# Altium PCB PCB1.PcbDoc
Units mm, origin at the board's own origin, x right, y up, seen from the top; angles counter-clockwise.
Board outline 49.78 x 45.47 mm, 4 copper layers (Top Layer, GROUND, POWER, Bottom Layer), stack 1.565 mm thick; 40 components, 39 nets, 194 pads, 11 vias.
Unrouted connection lines stored in the file: 68.
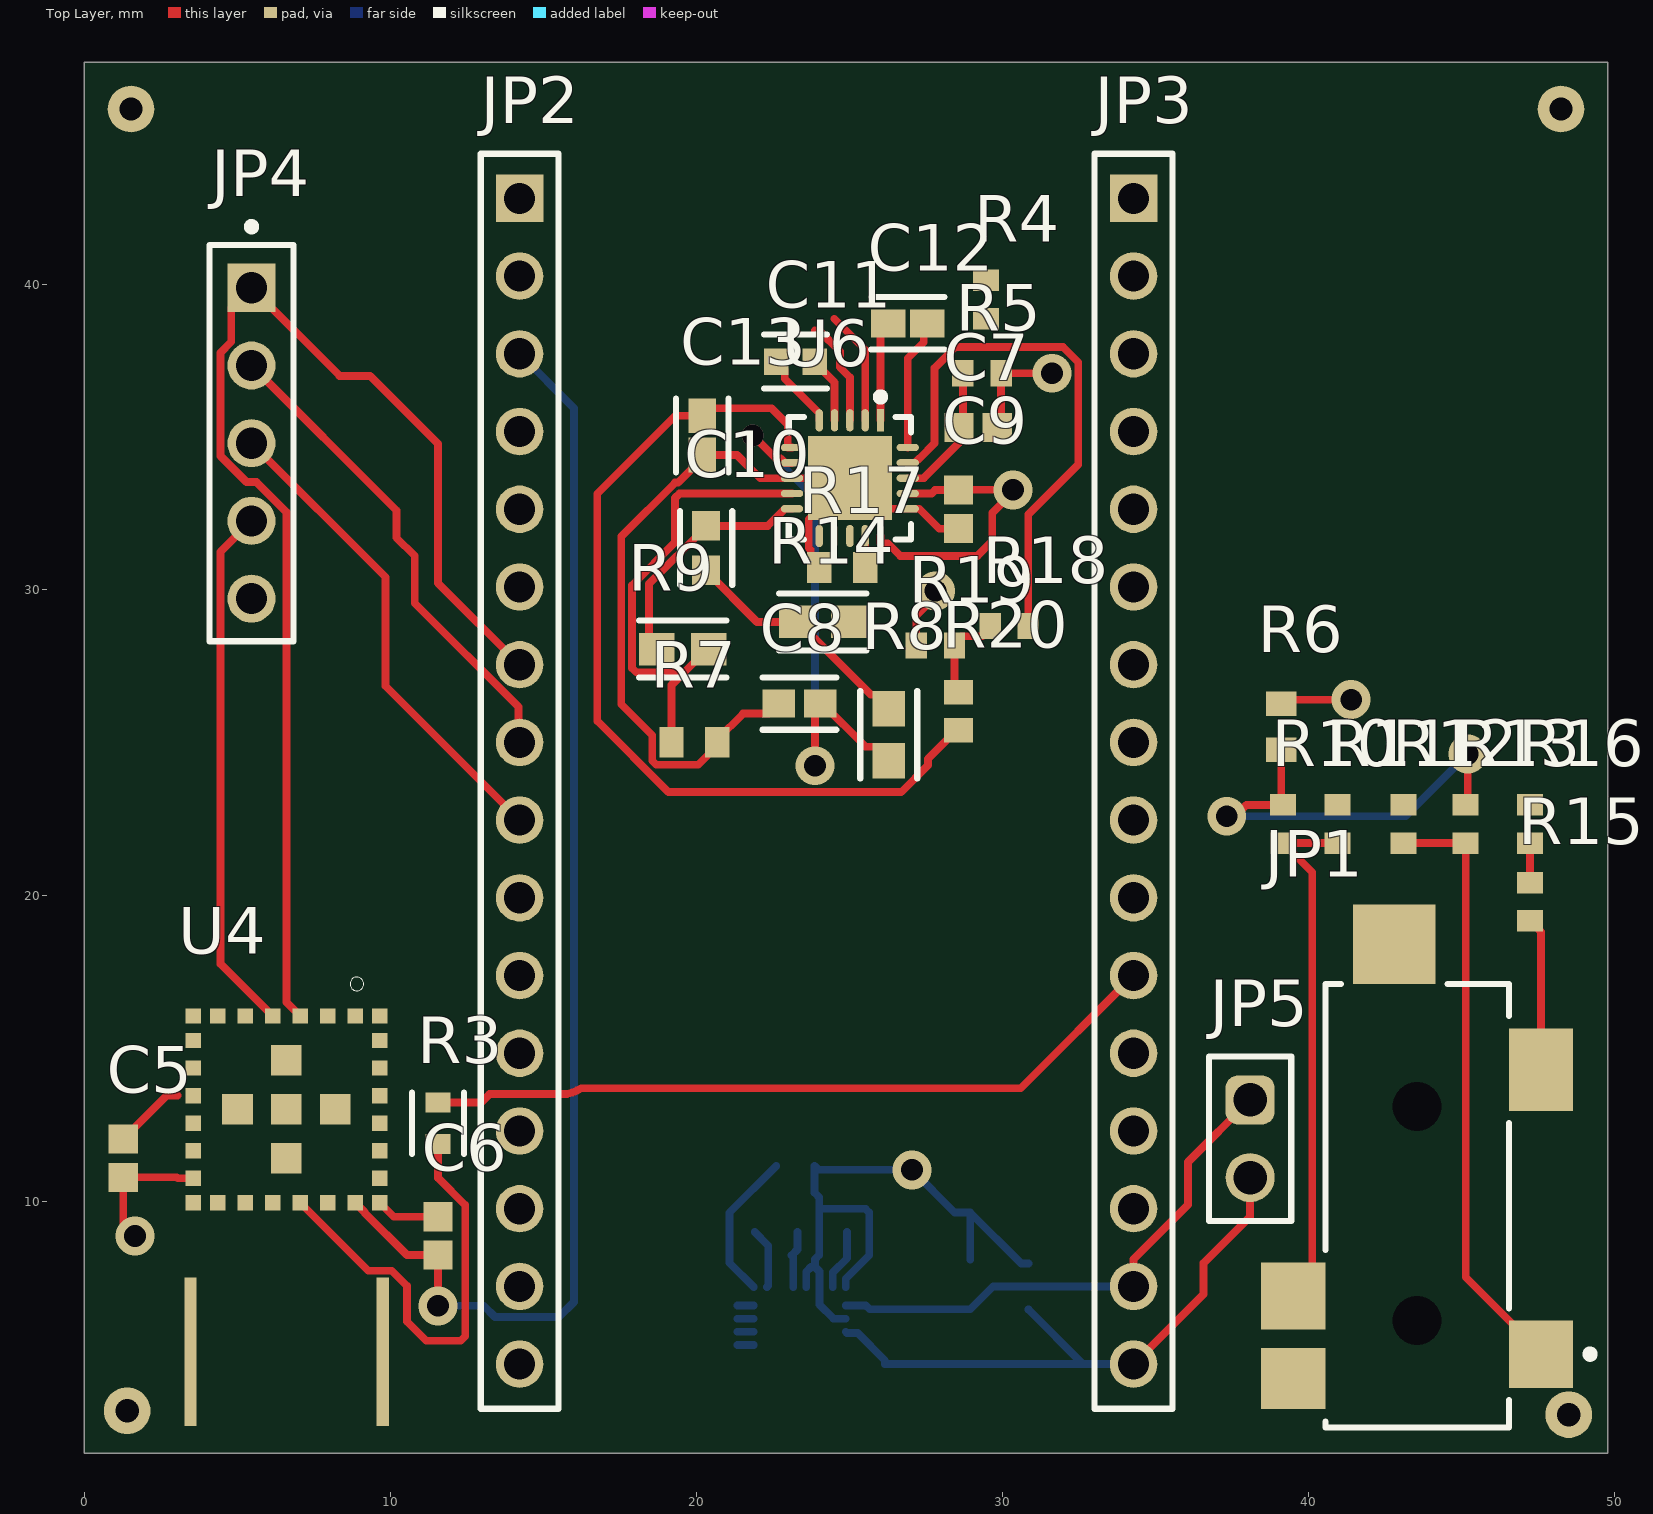
[diagram p0: Top Layer view]
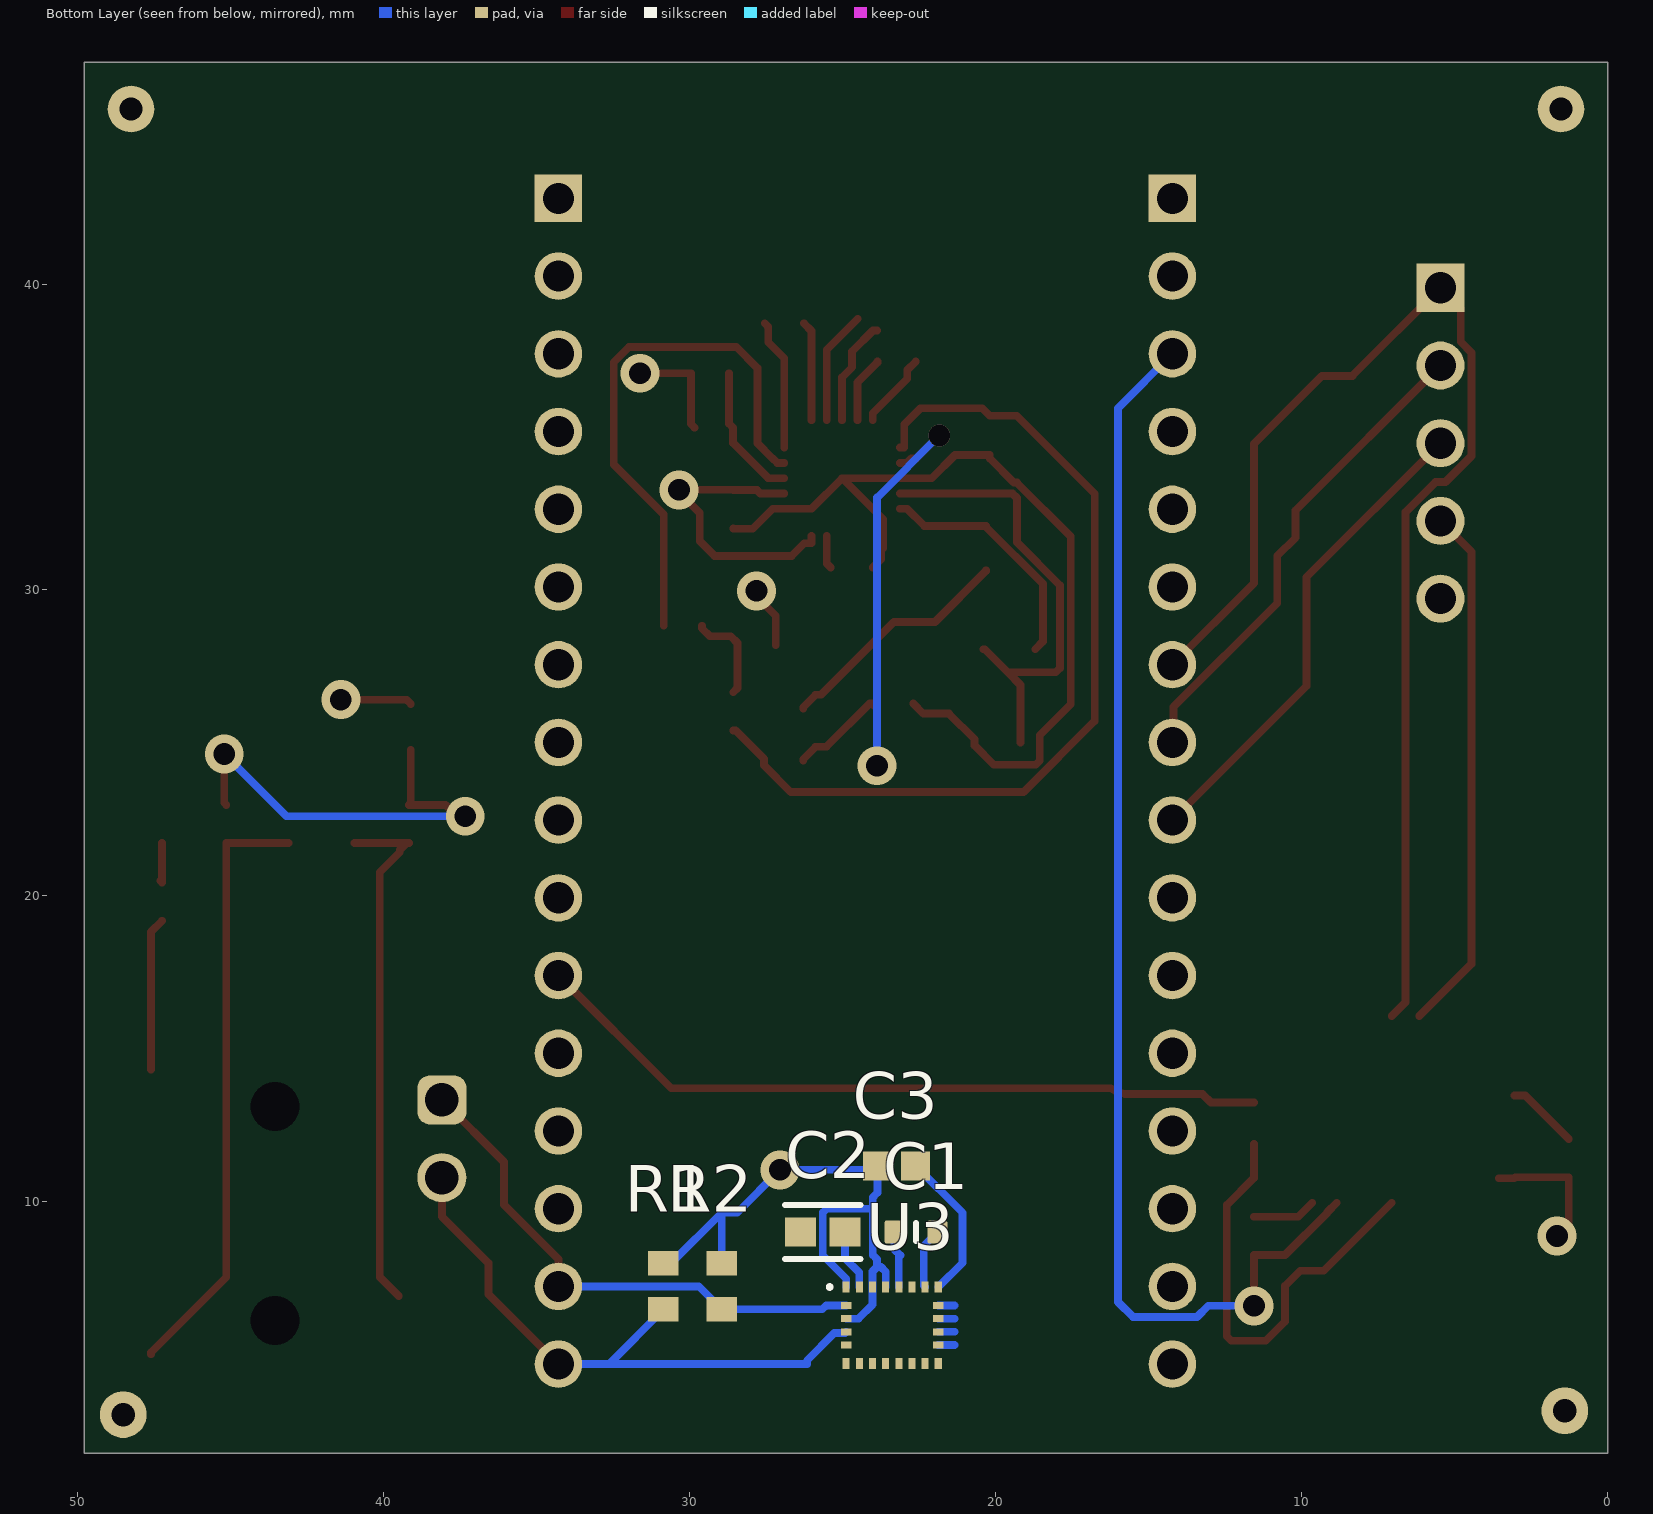
[diagram p1: Bottom Layer view, seen from below]
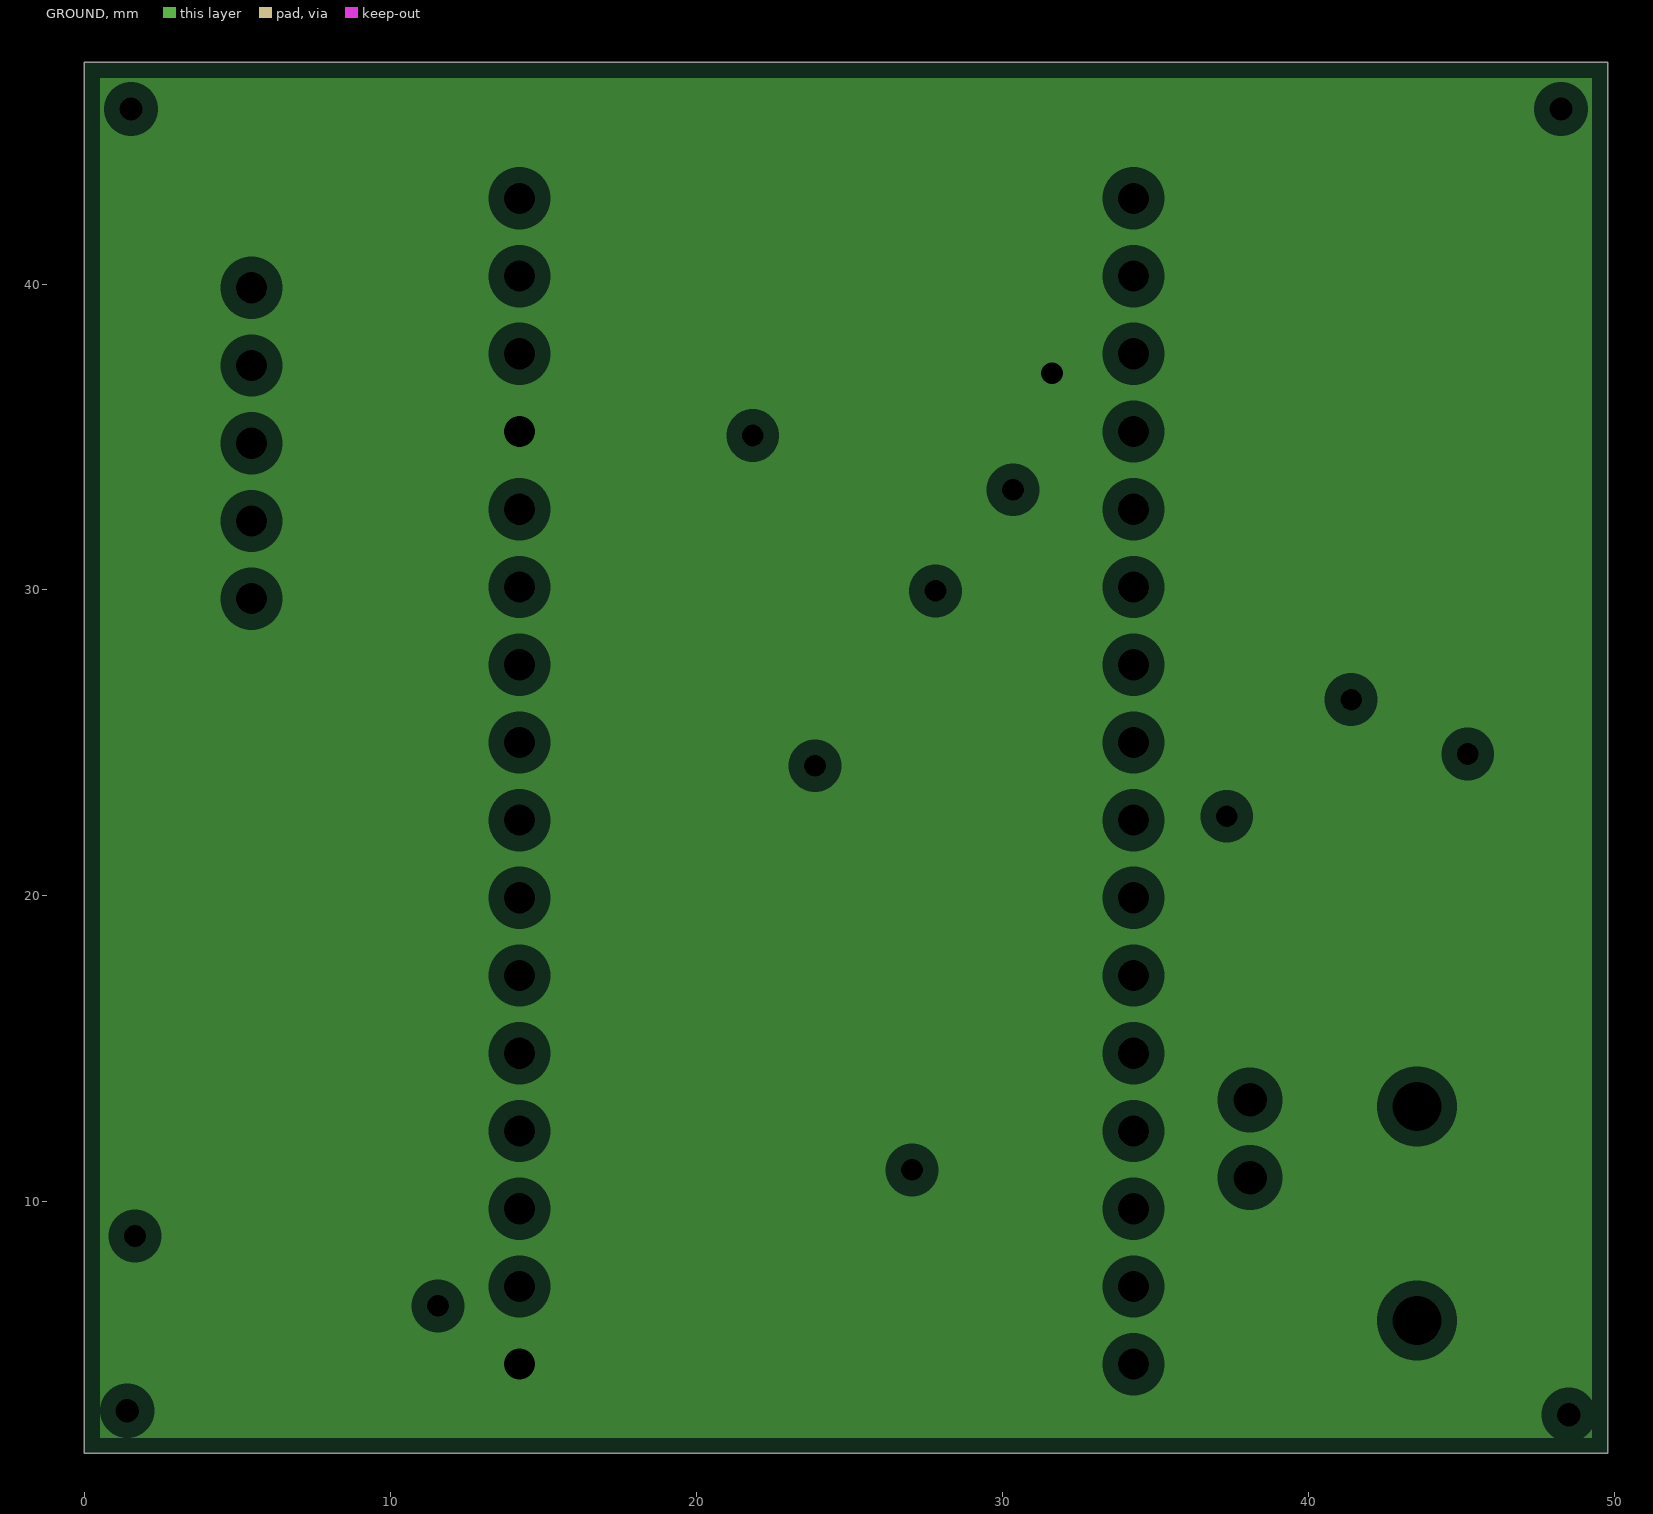
[diagram p2: GROUND, clearances drawn from the general rule]
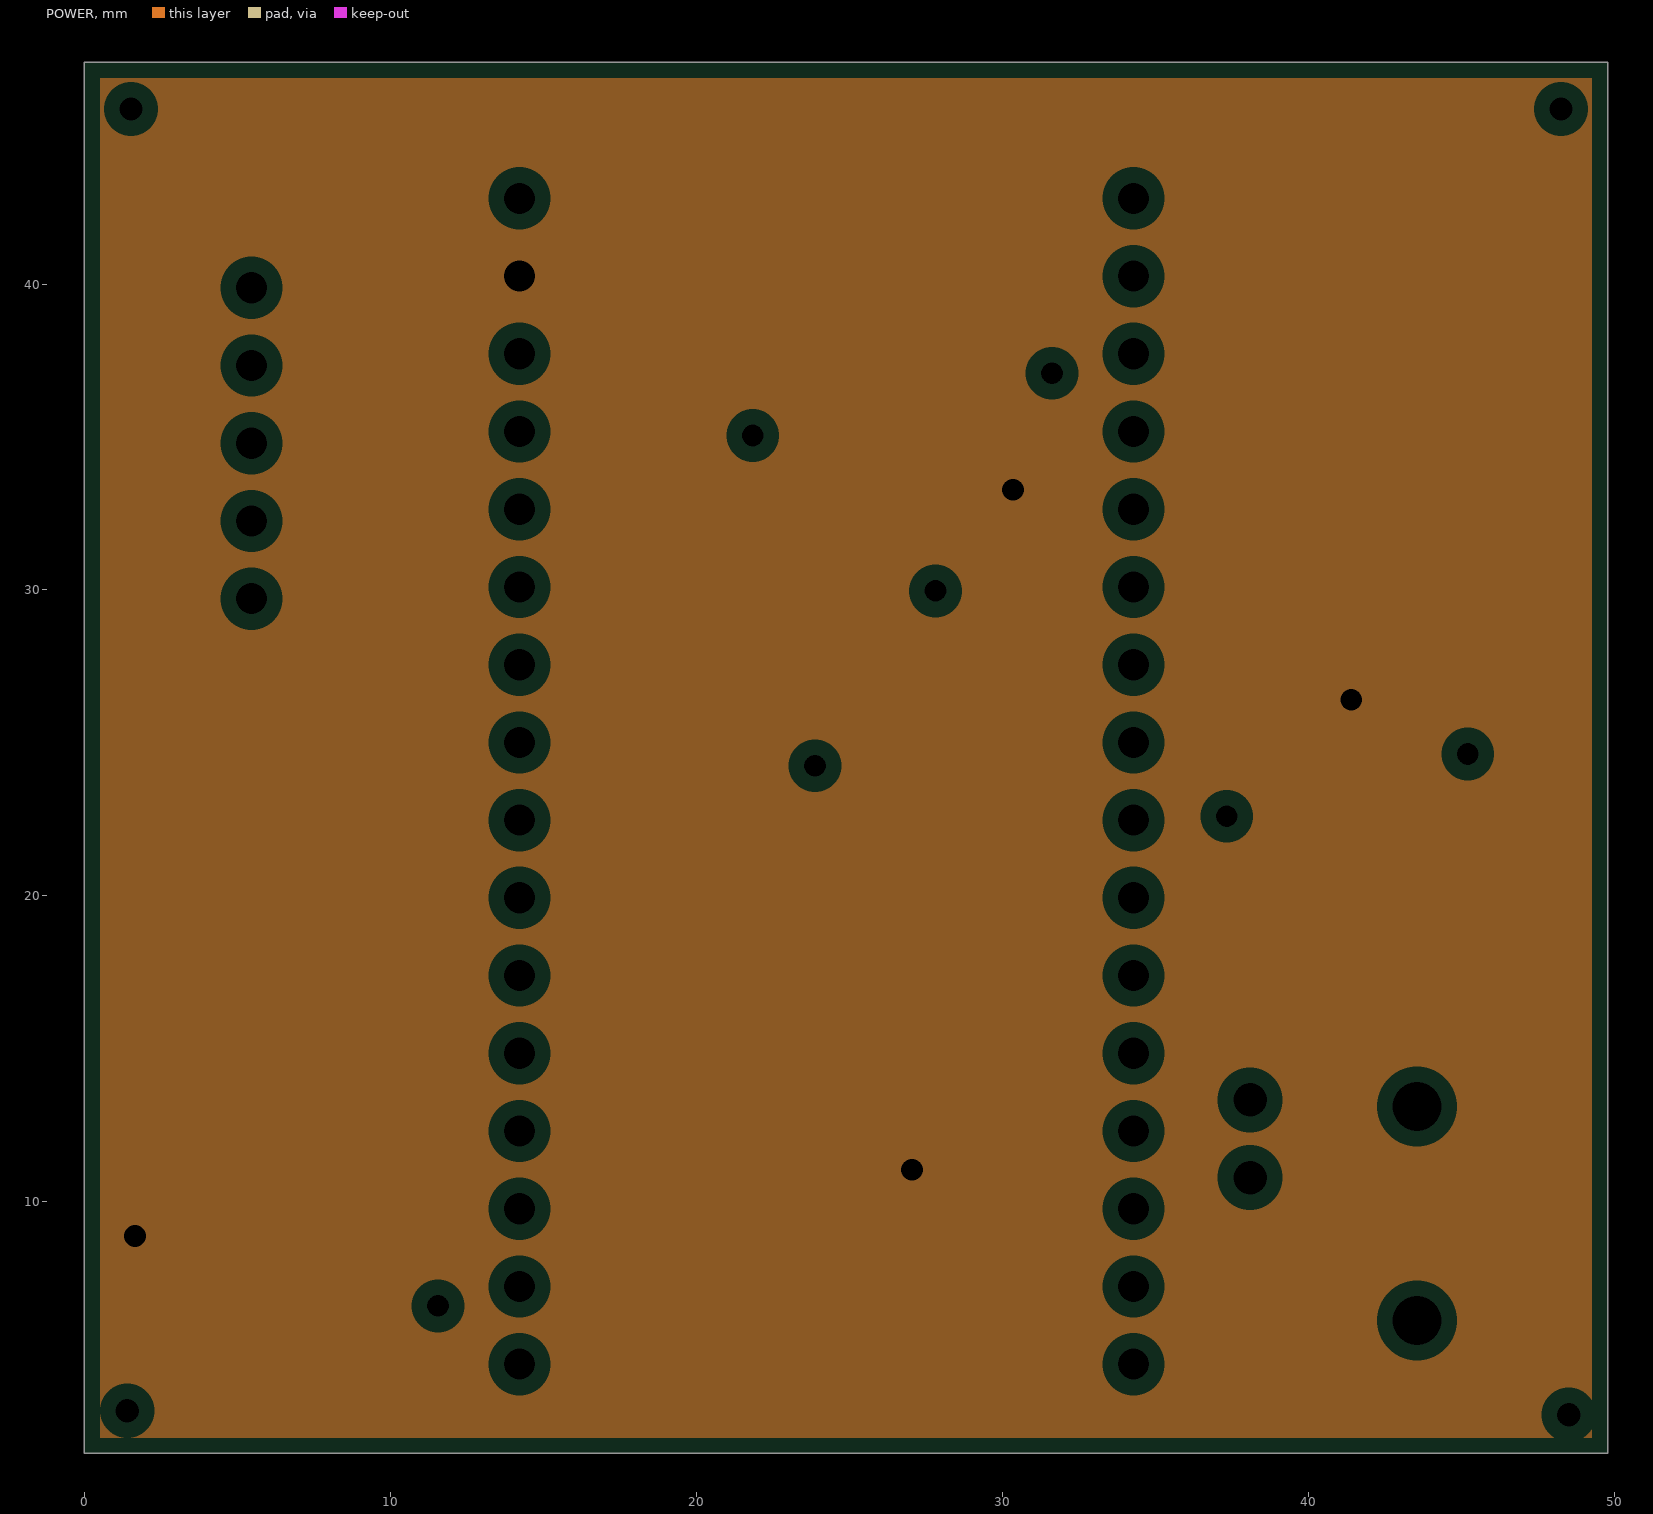
[diagram p3: POWER, clearances drawn from the general rule]
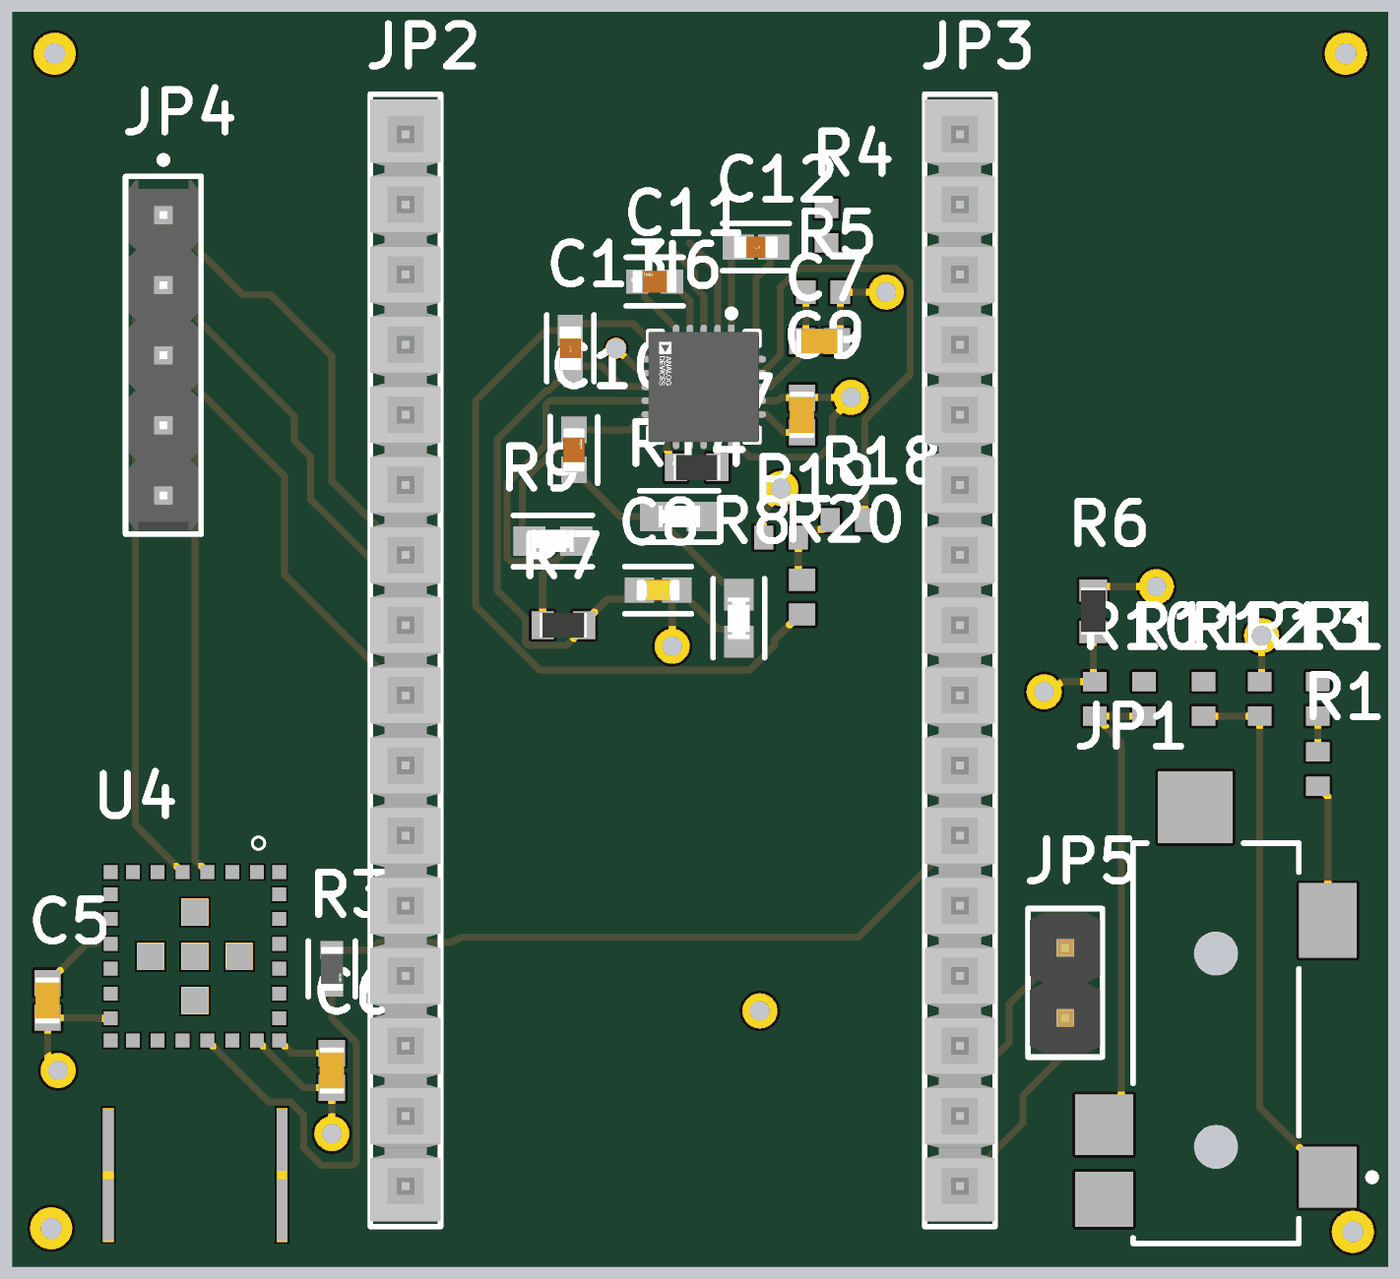
[diagram p4: 3D render of the assembled board from above, using the file's embedded part models]
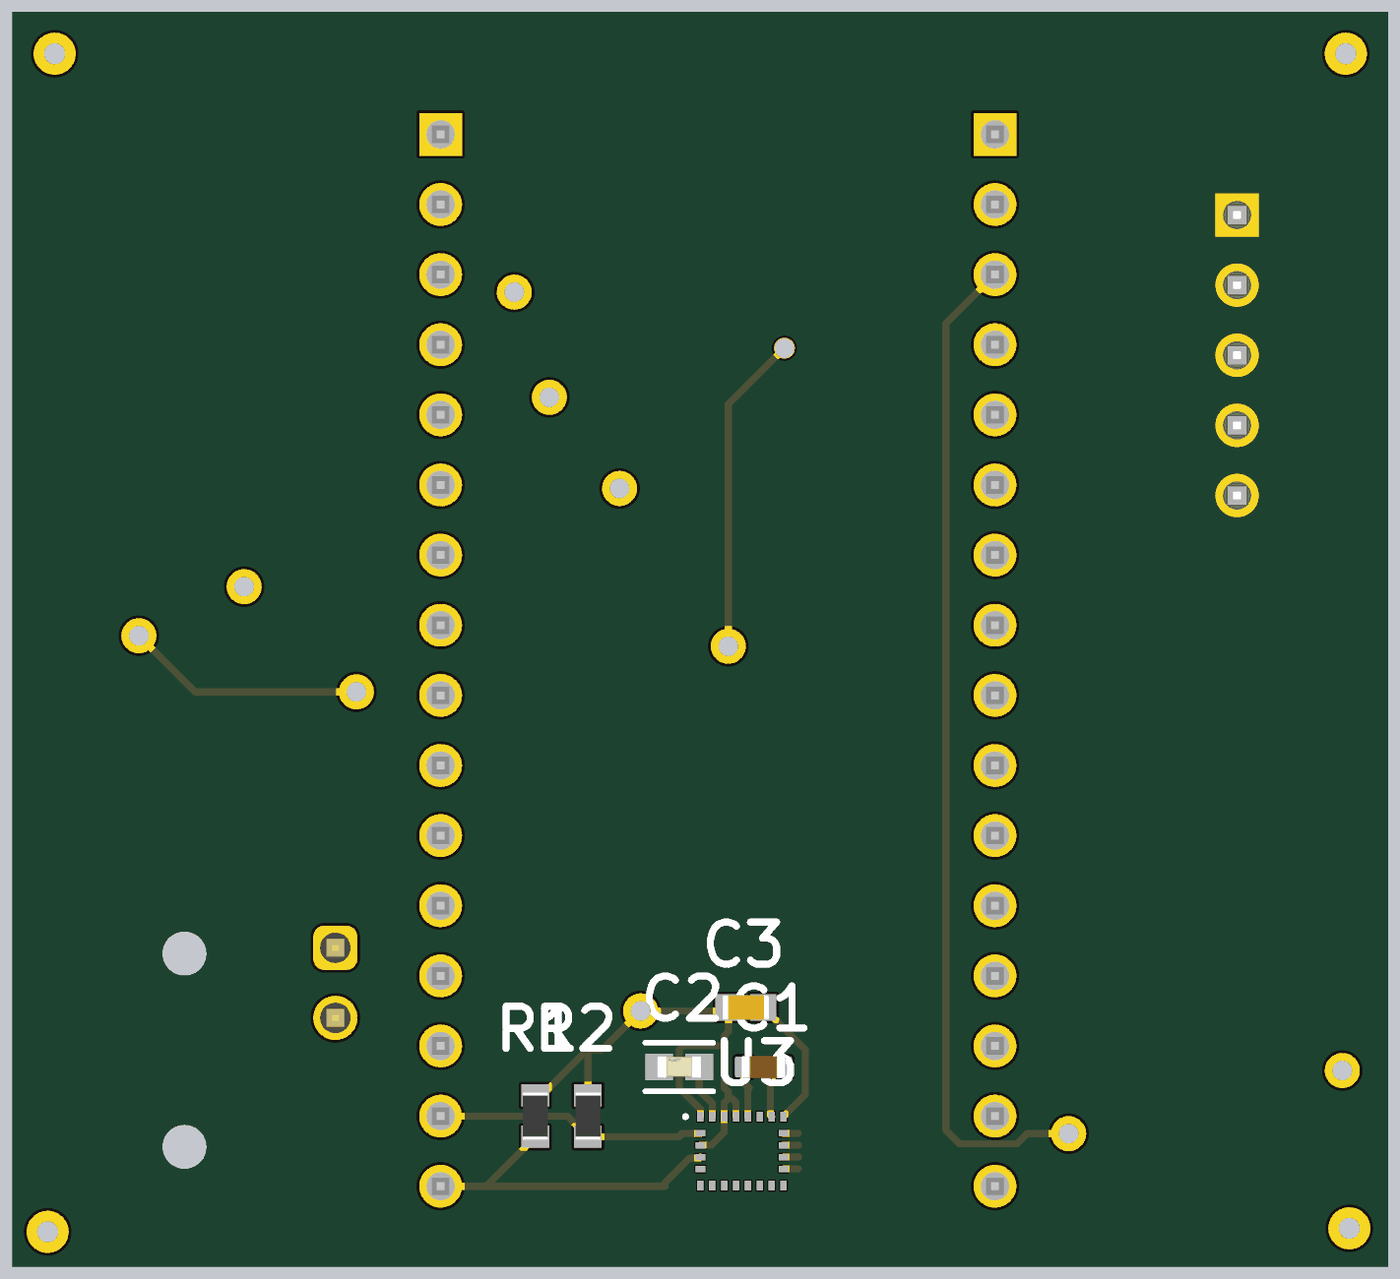
[diagram p5: 3D render of the assembled board from below, using the file's embedded part models]

## Layer stack, top to bottom
Top Solder: solder mask 0.0102, Solder Resist, Dk 3.5
Top Layer: signal copper 0.0356
Dielectric 2: prepreg 0.254, PP-006, Dk 4.1
GROUND: plane copper 0.0356, net GND
Dielectric 1: dielectric 0.9144, FR-4, Dk 4.8
POWER: plane copper 0.0356, net 3V3
Dielectric 3: prepreg 0.254, PP-006, Dk 4.1
Bottom Layer: signal copper 0.0356
Bottom Solder: solder mask 0.0102, Solder Resist, Dk 3.5

## Board outline
0,1.778 49.784,1.778 49.784,47.244 0,47.244

## Design rules (kind name [scope] priority, off if disabled: settings)
Clearance JLCPCB_Clearence [All] p1: gap=0.254 ignorepadtopadclearanceinfootprint=FALSE except(0: SMDPad-Hole THPad-Hole Via-Hole Fill-Hole Poly-Hole Region-Hole Hole-Hole; 0.09: Arc-Arc Arc-Track Arc-Text Track-Track Track-Text Text-Text; 0.127: SMDPad-SMDPad; 0.5: Arc-Hole Track-Hole Text-Hole)
Clearance Clearance_1 [OnMid vs OnMid] p2: gap=0.1 ignorepadtopadclearanceinfootprint=FALSE sourcerule=39 cellrowname=All cellrowtype=0 cellcolname=All cellcoltype=0 innerlayers=TRUE
Clearance Clearance_2 [(ExistsOnLayer('Top Layer') Or ExistsOnLayer('Bottom Layer')) vs (ExistsOnLayer('Top Layer') Or ExistsOnLayer('Bottom Layer'))] p3: gap=0.1 ignorepadtopadclearanceinfootprint=FALSE sourcerule=39 cellrowname=All cellrowtype=0 cellcolname=All cellcoltype=0 outerlayers=TRUE
Clearance [All] p4: gap=0.254 ignorepadtopadclearanceinfootprint=FALSE ismatrix=TRUE
PlaneClearance [All] p1: clearance=0.508
PlaneConnect PlaneConnect_1 [InNet('GND') And OnLayer('GROUND')] p1: planeconnectstyle=Relief reliefexpansion=0.508 reliefentries=4 reliefconductorwidth=0.254 reliefairgap=0.254
PlaneConnect PlaneConnect_2 [InNet('3V3') And OnLayer('POWER')] p2: planeconnectstyle=Relief reliefexpansion=0.508 reliefentries=4 reliefconductorwidth=0.254 reliefairgap=0.254
PlaneConnect [All] p3: planeconnectstyle=Relief reliefexpansion=0.508 reliefentries=4 reliefconductorwidth=0.254 reliefairgap=0.254
PolygonConnect [All] p1: connectstyle=Relief reliefconductorwidth=0.254 reliefentries=4 polygonreliefangle="90 Angle" airgapwidth=0.254
RoutingVias [All] p1: holewidth=0.711 width=1.27 viastyle="Through Hole" minholewidth=0.711 minwidth=1.27 maxholewidth=0.711 maxwidth=1.27
SolderMaskExpansion [All] p1: expansion=0.102 istentingtop=FALSE
Width [All] p1: maxlimit=0.254 minlimit=0.254 preferedwidth=0.254
28 further rules are at their usual default settings.

## Classes and differential pairs
component class MCU: C5 C6 JP2 JP3 JP4 JP5 R3 U1 U4
component class IMU: C1 C2 C3 R1 R2 U3
component class ECG: C7 C8 C9 C10 C11 C12 C13 JP1 R4 R5 R6 R7 R8 R9 R10 R11 R12 R13 R14 R15 R16 R17 R18 R19 R20 U6

## Components (designator, comment, footprint, x,y, rotation, side; value= is the part's Value field where it differs from the comment)
C1 "Capacitor 10µF +/-20% 10V 0603" CAPC0603(1608)100_L 22.606,9.017 r180 bottom value=10µF
C2 "Capacitor 220 nF" FP-C0603C-CF-IPC_B 25.654,9.017 r180 bottom value=220nF
C3 "Capacitor 100 nF +/-10% 50 V 0603" CAPC1608X90X40NL10T20 23.241,11.176 r180 bottom value=100nF
C5 "Capacitor 100 nF +/-10% 50 V 0603" CAPC1608X90X40NL10T20 1.27,11.43 r90 top value=100nF
C6 "Capacitor 100 nF +/-10% 50 V 0603" CAPC1608X90X40NL10T20 11.557,8.89 r90 top value=100nF
C7 "Capacitor 100 nF +/-10% 50 V 0603" CAPC1608X90X40NL10T20 29.21,35.306 r180 top value=100nF
C8 "Capacitor 10nF 0603" FP-CC0603-DA-IPC_B 23.368,26.289 r0 top value=10nF
C9 "Capacitor 100 nF +/-10% 50 V 0603" CAPC1608X90X40NL10T20 28.575,32.639 r270 top value=100nF
C10 "Capacitor 1.5 nF 0603" FP-GRM188-0_1-e0_2_0_5-IPC_B 20.32,31.369 r90 top value=1.5nF
C11 "Capacitor 1 nF 0603" FP-0603-L_1_6_0_15-W_0_81-IPC_C 23.241,37.465 r180 top value=1nF
C12 "Capacitor .33 uF 0603" FP-C1608-080-0_1-IPC_B 26.91,38.715 r180 top value=330nF
C13 "Capacitor .33 uF 0603" FP-C1608-080-0_1-IPC_B 20.193,35.052 r90 top value=330nF
JP1 "3.5mm Jack" SWIT-35RASMT4BHNTRX_V 43.561,11.325 r90 top
JP2 "MCU row 1" SMTC-TSW-116-08-X-S 14.224,42.799 r270 top
JP3 "MCU row 2" SMTC-TSW-116-08-X-S 34.29,42.799 r270 top
JP4 "UART breakouts" FP-22-28-4050-MFG 5.461,34.798 r270 top
JP5 "I2C breakouts" 61300211121 38.1,12.065 r270 top
R1 "Resistor 10k +/-1% 0603 100 mW" RESC1608X55X25ML10T15 30.861,7.239 r270 bottom value=10k
R2 "Resistor 10k +/-1% 0603 100 mW" RESC1608X55X25ML10T15 28.956,7.239 r270 bottom value=10k
R3 "Resistor 100k" FP-RC0603-0_55-IPC_C 11.557,12.573 r270 top value=100k
R4 "Resistor 10M" RESC1608X55X30LL15T15 29.464,39.497 r270 top value=10M
R5 "Resistor 10M" RESC1608X55X30LL15T15 29.337,37.084 r180 top value=10M
R6 "Resistor 0R +/- 5% 0603 100 mW" RESC1608X55X25ML10T15 39.116,25.527 r90 top value=0
R7 "Resistor 100k +/-1% 0603 100 mW" RESC1608X55X25ML10T15 19.939,25.019 r0 top value=100k
R8 "Resistor 1M 0603" FP-ERJ3EK-IPC_A 26.289,25.273 r90 top value=1M
R9 "Resistor 1M 0603" FP-ERJ3EK-IPC_A 19.558,28.067 r0 top value=1M
R10 "Resistor 10M" RESC1608X55X30LL15T15 39.176,22.352 r90 top value=10M
R11 "Resistor 180k" RESC1608X55X30LL15T15 40.954,22.352 r90 top value=180k
R12 "Resistor 180k" RESC1608X55X30LL15T15 43.113,22.352 r90 top value=180k
R13 "Resistor 10M" RESC1608X55X30LL15T15 45.145,22.352 r90 top value=10M
R14 "Resistor 1M 0603" FP-ERJ3EK-IPC_A 24.13,28.956 r0 top value=1M
R15 "Resistor 180k" RESC1608X55X30LL15T15 47.244,19.812 r90 top value=180k
R16 "Resistor 180k" RESC1608X55X30LL15T15 47.244,22.352 r90 top value=180k
R17 "Resistor 0R +/- 5% 0603 100 mW" RESC1608X55X25ML10T15 24.765,30.734 r0 top value=0
R18 "Resistor 10M" RESC1608X55X30LL15T15 30.226,28.829 r0 top value=10M
R19 "Resistor 10M" RESC1608X55X30LL15T15 27.813,28.194 r0 top value=10M
R20 "Resistor 1.4M 0603" RESC1609X50X30NL10T20 28.575,26.035 r90 top value=1.4M
U3 "LSM9DS1TR" STM-LGA-24_3500X3000X1000 23.382,5.969 r180 bottom
U4 "CC2564MODACMOG" XCVR_CC2564MODACMOG 6.604,9.525 r270 top
U6 "AD8232ACPZ-R7" FP-CP-20-8-IPC_C 25.019,33.655 r270 top

## Footprints (in the part's own frame and the unit in brackets; to place one, negate y for a bottom-side part, rotate by r counter-clockwise, add the part's x,y. Pads: shape width x height; smd on the part's side, far side on the other; paste and mask are expansions set on the pad)
61300211121 [mm] "Pin Header, pitch 2.54 mm, THT, Vertical, single row, 2p"
  rrect50% 1.6x1.6 hole 1.1: 1(-1.27,0)
  round 1.6 hole 1.1: 2(1.27,0)
  silkscreen extent -2.69,-1.35 2.69,1.35, body extent -2.54,-1.27 2.54,1.27, height 8.57
CAPC0603(1608)100_L [mm] "Chip Capacitor, Body 1.6x0.8mm, Height 1.0mm, IPC High Density"
  rrect25% 0.66x0.76 smd: 1(-0.7,0) 2(0.7,0)
  silkscreen extent 0,-0.3 0,0.3, body extent -0.8,-0.4 0.8,0.4, height 0.95
CAPC1608X90X40NL10T20 [mm] "Chip Capacitor, 2-Leads, Body 1.70x0.90mm, IPC Medium Density"
  rect 0.95x0.95 smd: 1(-0.625,0) 2(0.625,0)
  body extent -0.85,-0.45 0.85,0.45, height 0.9
FP-22-28-4050-MFG [mm]
  rect 1.57x1.57 hole 1.02 paste-2539.97 mask+0: 1(-5.08,0)
  round 1.57 hole 1.02 paste-2539.97 mask+0: 2(-2.54,0) 3(0,0) 4(2.54,0) 5(5.08,0)
  silkscreen extent -7.2,-1.37 6.48,1.37, body extent -6.58,-1.47 6.58,1.47, height 0.25
FP-0603-L_1_6_0_15-W_0_81-IPC_C [mm]
  rect 0.807x0.868 smd paste+0 mask+0: 1(-0.626,0) 2(0.626,0)
  silkscreen extent -1.03,-0.88 1.03,0.88, body extent -1.13,-0.58 1.13,0.58, height 0.25
FP-C0603C-CF-IPC_B [mm]
  rect 1.007x0.958 smd paste+0 mask+0: 1(-0.726,0) 2(0.726,0)
  silkscreen extent -1.23,-0.88 1.23,0.88, body extent -0.8,-0.4 0.8,0.4, height 0.87
FP-C1608-080-0_1-IPC_B [mm]
  rect 1.131x0.912 smd paste+0 mask+0: 1(-0.641,0) 2(0.641,0)
  silkscreen extent -1.21,-0.86 1.21,0.86, body extent -1.46,-0.71 1.46,0.71, height 0.25
FP-CC0603-DA-IPC_B [mm]
  rect 1.058x0.912 smd paste+0 mask+0: 1(-0.677,0) 2(0.677,0)
  silkscreen extent -1.21,-0.86 1.21,0.86, body extent -1.46,-0.71 1.46,0.71, height 0.25
FP-CP-20-8-IPC_C [mm]
  rect 0.731x0.239 smd paste+0 mask+0: 1(-1.891,1)
  rrect100% 0.731x0.239 smd paste+0 mask+0: 2(-1.891,0.5) 3(-1.891,0) 4(-1.891,-0.5) 5(-1.891,-1) 11(1.891,-1) 12(1.891,-0.5) 13(1.891,0) 14(1.891,0.5) 15(1.891,1)
  rrect100% 0.239x0.731 smd paste+0 mask+0: 6(-1,-1.891) 7(-0.5,-1.891) 8(0,-1.891) 9(0.5,-1.891) 10(1,-1.891) 16(1,1.891) 17(0.5,1.891) 18(0,1.891) 19(-0.5,1.891) 20(-1,1.891)
  rect 2.75x2.75 smd paste-1000 mask+0: 21(0,0)
  silkscreen extent -2.78,-2 2,2, body extent -2.36,-2.36 2.36,2.36, height 0.25
FP-ERJ3EK-IPC_A [mil]
  rect 45.53x41.82 smd paste+0 mask+0: 1(-33.5,0) 2(33.5,0)
  silkscreen extent -56,-37 56,37, body extent -76,-41 76,41, height 10
FP-GRM188-0_1-e0_2_0_5-IPC_B [mm]
  rect 0.959x0.912 smd paste+0 mask+0: 1(-0.727,0) 2(0.727,0)
  silkscreen extent -1.21,-0.86 1.21,0.86, body extent -1.46,-0.71 1.46,0.71, height 0.25
FP-RC0603-0_55-IPC_C [mm]
  rect 0.659x0.812 smd paste+0 mask+0: 1(-0.677,0) 2(0.677,0)
  silkscreen extent -1.01,-0.85 1.01,0.85, body extent -1.11,-0.55 1.11,0.55, height 0.25
RESC1608X55X25ML10T15 [mm] "Chip Resistor, 2-Leads, Body 1.70x0.90mm, IPC Low Density"
  rect 0.8x1 smd: 1(-0.75,0) 2(0.75,0)
  body extent -0.85,-0.45 0.85,0.45, height 0.55
RESC1608X55X30LL15T15 [mm] "Chip Resistor, 2-Leads, Body 1.60x0.80mm, IPC High Density"
  rect 0.7x0.85 smd: 1(-0.625,0) 2(0.625,0)
  body extent -0.87,-0.48 0.87,0.48, height 0.55
RESC1609X50X30NL10T20 [mm] "Chip Resistor, 2-Leads, Body 1.55x0.85mm, IPC Medium Density"
  rect 0.8x0.95 smd: 1(-0.625,0) 2(0.625,0)
  body extent -0.82,-0.48 0.82,0.48, height 0.5
SMTC-TSW-116-08-X-S [mm] ".025 SQ Post Terminal Strip Assembly, 1x16 Pins, Vertical, 2.54mm Pitch, Male"
  rect 1.55x1.55 hole 1.02: 1(0,0)
  round 1.55 hole 1.02: 2(2.54,0) 3(5.08,0) 4(7.62,0) 5(10.16,0) 6(12.7,0) 7(15.24,0) 8(17.78,0) 9(20.32,0) 10(22.86,0) 11(25.4,0) 12(27.94,0) 13(30.48,0) 14(33.02,0) 15(35.56,0) 16(38.1,0)
  silkscreen extent -1.46,-1.27 39.56,1.27, body extent -1.27,-1.27 39.37,1.27, height 8.38
STM-LGA-24_3500X3000X1000 [mm] "LGA, 24-Leads, Body 3.65x3.15mm, Pitch 0.43mm"
  rect 0.23x0.35 smd mask+0.05: 1(-1.505,1.25) 6(-1.505,-1.25) 7(-1.075,-1.25) 8(-0.645,-1.25) 9(-0.215,-1.25) 10(0.215,-1.25) 11(0.645,-1.25) 12(1.075,-1.25) 13(1.505,-1.25) 18(1.505,1.25) 19(1.075,1.25) 20(0.645,1.25) 21(0.215,1.25) 22(-0.215,1.25) 23(-0.645,1.25) 24(-1.075,1.25)
  rect 0.35x0.23 smd mask+0.05: 2(-1.505,0.645) 3(-1.505,0.215) 4(-1.505,-0.215) 5(-1.505,-0.645) 14(1.505,-0.645) 15(1.505,-0.215) 16(1.505,0.215) 17(1.505,0.645)
  silkscreen extent -2.11,1.19 -1.98,1.31, body extent -1.82,-1.57 1.83,1.58, height 1.03
SWIT-35RASMT4BHNTRX_V [mm] "Jack, 5-Leads, Body 17x6mm"
  rect 2.2x2.1 smd: 1(-6.3,-4.05) 2(-4.4,4.05)
  rect 2.7x2.1 smd: 3(3,-4.05)
  rect 2x2.1 smd: 4(-7.1,4.05)
  rect 2.6x2.7 smd: 5(7.1,0.75)
  rect 0x0 hole 1.6 unplated: MH1(-5.2,0) MH2(1.8,0)
  silkscreen extent -8.7,-5.78 5.8,3, body extent -11.2,-3 5.8,3, height 5
XCVR_CC2564MODACMOG [mm]
  rect 0.5x0.5 smd mask+0: 1(-6.55,2.25) 2(-6.55,1.35) 3(-6.55,0.45) 4(-6.55,-0.45) 5(-6.55,-1.35) 6(-6.55,-2.25) 7(-5.75,-3.05) 8(-4.85,-3.05) 9(-3.95,-3.05) 10(-3.05,-3.05) 11(-2.15,-3.05) 12(-1.25,-3.05) 13(-0.45,-2.25) 14(-0.45,-1.35) 15(-0.45,-0.45) 16(-0.45,0.45) 17(-0.45,1.35) 18(-0.45,2.25) 19(-1.25,3.05) 20(-2.15,3.05) 21(-3.05,3.05) 22(-3.95,3.05) 23(-4.85,3.05) 24(-5.75,3.05) 30(-6.55,3.05) 31(-6.55,-3.05) 32(-0.45,-3.05) 33(-0.45,3.05)
  rect 1x1 smd paste-1 mask+0: 25(-5.1,0) 26(-3.5,-1.6) 27(-3.5,0) 28(-3.5,1.6) 29(-1.9,0)
  rect 4.85x0.4 smd paste-3 mask+0: 34(4.425,-3.135) 35(4.425,3.15)
  silkscreen extent -7.82,2.08 -7.38,2.52

## Part data
C1: library part CMP-001-00075-4, "Chip Capacitor, 10µF +/-20%, 10V, 0603, Thickness 1 mm", Case/Package=0603, Max Operating Temperature=85°C, Min Operating Temperature=-55°C, Tolerance=10%, Voltage Rating=10V, Mounting Technology=SMT, Pins=2
C2: library part CMP-001-00085-1, "Ceramic Capacitor, Multilayer, Ceramic, 25V, 10% +Tol, 10% -Tol, X7R, 15% TC, 0.22uF, Surface Mount, 0603", Capacitor Type=Ceramic, Case/Package=0603, Max Operating Temperature=125°C, Min Operating Temperature=-55°C, Mounting Technology="Surface Mount", Pins=2, RoHS Compliant=Yes
C3 C5 C6 C7 C9: library part CMP-001-00017-6, "Chip Capacitor, 100 nF, +/- 10%, 50 V, 0603 (1608 Metric)", Capacitor Type=Ceramic, Case/Package=0603, Max Operating Temperature=125°C, Min Operating Temperature=-55°C, Tolerance=10%, Voltage Rating=50V, Mounting Technology=SM, Pins=2, RoHS Compliant=True
C8: library part CMP-001-00089-1, "Ceramic Capacitor, Multilayer, Ceramic, 50V, 10% +Tol, 10% -Tol, X7R, 15% TC, 0.01uF, Surface Mount, 0603", Capacitor Type=Ceramic, Case/Package=0603, Max Operating Temperature=125°C, Min Operating Temperature=-55°C, Mounting Technology="Surface Mount", Pins=2, RoHS Compliant=Yes
C10: library part CMP-001-00088-1, "Ceramic Capacitor, Multilayer, Ceramic, 50V, 5% +Tol, 5% -Tol, C0G, 30ppm/Cel TC, 0.0015uF, Surface Mount, 0603", Capacitor Type=Ceramic, Case/Package=0603, Max Operating Temperature=125°C, Min Operating Temperature=-55°C, Mounting Technology="Surface Mount", Pins=2, RoHS Compliant=Yes
C11: library part CMP-001-00087-1, "Ceramic Capacitor, Multilayer, Ceramic, 50V, 10% +Tol, 10% -Tol, X7R, 15% TC, 0.001uF, Surface Mount, 0603", Capacitor Type=Ceramic, Case/Package=0603, Max Operating Temperature=125°C, Min Operating Temperature=-55°C, Mounting Technology="Surface Mount", Pins=2, RoHS Compliant=Yes
C12 C13: library part CMP-001-00086-1, "Ceramic Capacitor, Multilayer, Ceramic, 50V, 10% +Tol, 10% -Tol, X7R, 15% TC, 0.33uF, Surface Mount, 0603", Capacitor Type=Ceramic, Case/Package=0603, Max Operating Temperature=125°C, Min Operating Temperature=-55°C, Mounting Technology="Surface Mount", Pins=2, RoHS Compliant=Yes
JP1: library part CMP-002-00071-1, "3 Pole(s), Surface Mount Terminal, Jack", Connector Type="AUDIO/RCA CONNECTOR", Mounting Technology=Board, RoHS Compliant=Yes
JP2 JP3: library part CMP-002-00076-1, "Board Connector, 16 Contact(s), 1 Row(s), Male, Straight, 0.1 inch Pitch, Solder Terminal, Black Insulator", Connector Type="BOARD CONNECTOR", Mounting Technology=Board, RoHS Compliant=Yes
JP4: library part CMP-002-00072-1, "Board Connector, 5 Contact(s), 1 Row(s), Male, Straight, 0.1 inch Pitch, Solder Terminal, Locking, Black Insulator, Receptacle", Connector Type="BOARD CONNECTOR", Mounting Technology=Board, RoHS Compliant=Yes
JP5: library part CMP-002-00074-2, "Board Connector, 2 Contact(s), 1 Row(s), Male, Straight, 0.1 inch Pitch, Solder Terminal, Locking, Black Insulator, Plug", Max Operating Temperature=125°C, Min Operating Temperature=-40°C, Connector Type="BOARD CONNECTOR", Mounting Technology=Board, RoHS Compliant=Yes
R1 R2: library part CMP-009-00017-5, "Chip Resistor, 10 KOhm, +/- 1%, 01 W, -55 to 155 degC, 0603 (1608 Metric)", Case/Package=0603, Max Operating Temperature=155°C, Min Operating Temperature=-55°C, Power=100mW, Tolerance=1%, Voltage Rating=50V, Mounting Technology=SM, Pins=2, RoHS Compliant=True
R3: library part CMP-009-00183-1, "Fixed Resistor, Metal Glaze/thick Film, 0.1W, 100000ohm, 75V, 1% +/-Tol, 100ppm/Cel, Surface Mount, 0603", Case/Package=0603, Max Operating Temperature=155°C, Min Operating Temperature=-55°C, Power=100mW, Tolerance=1%, Mounting Technology="Surface Mount", Pins=2, RoHS Compliant=Yes
R4 R5 R10 R13 R18 R19: library part CMP-009-00182-1, "Fixed Resistor, Metal Glaze/thick Film, 0.1W, 10000000ohm, 75V, 5% +/-Tol, -400,150ppm/Cel, Surface Mount, 0603", Case/Package=0603, Max Operating Temperature=155°C, Min Operating Temperature=-55°C, Power=100mW, Tolerance=5%, Mounting Technology="Surface Mount", Pins=2, RoHS Compliant=Yes
R6 R17: library part CMP-009-00006-5, "Chip Resistor, 0 Ohm, 0.1 W, -55 to 155 degC, 0603 (1608 Metric)", Case/Package=0603, Max Operating Temperature=155°C, Min Operating Temperature=-55°C, Power=100mW, Tolerance=5%, Voltage Rating=50V, Mounting Technology=SM, Pins=2, RoHS Compliant=True
R7: library part CMP-009-00023-5, "Chip Resistor, 100 KOhm, +/- 1%, 0.1 W, -55 to 155 degC, 0603 (1608 Metric)", Case/Package=0603, Max Operating Temperature=155°C, Min Operating Temperature=-55°C, Power=100mW, Tolerance=1%, Voltage Rating=50V, Mounting Technology=SM, Pins=2, RoHS Compliant=True
R8 R9 R14: library part CMP-009-00185-1, "Fixed Resistor, Metal Glaze/thick Film, 0.1W, 1000000ohm, 75V, 1% +/-Tol, 100ppm/Cel, Surface Mount, 0603", Case/Package=0603, Max Operating Temperature=155°C, Min Operating Temperature=-55°C, Power=100mW, Tolerance=1%, Mounting Technology="Surface Mount", Pins=2, RoHS Compliant=Yes
R11 R12 R15 R16: library part CMP-009-00177-1, "Fixed Resistor, Metal Glaze/thick Film, 0.1W, 180000ohm, 75V, 1% +/-Tol, 100ppm/Cel, Surface Mount, 0603", Case/Package=0603, Max Operating Temperature=155°C, Min Operating Temperature=-55°C, Power=100mW, Tolerance=1%, Mounting Technology="Surface Mount", Pins=2, RoHS Compliant=Yes
R20: library part CMP-009-00184-1, "Fixed Resistor, Metal Glaze/thick Film, 0.1W, 1400000ohm, 75V, 1% +/-Tol, 100ppm/Cel, Surface Mount, 0603", Case/Package=0603, Max Operating Temperature=155°C, Min Operating Temperature=-55°C, Power=100mW, Tolerance=1%, Mounting Technology="Surface Mount", Pins=2, RoHS Compliant=Yes
U3: library part CMP-2000-06606-1, "iNEMO Inertial Module: 3D Accelerometer, 3D Gyroscope, 3D Magnetometer, 1.9 to 3.6 V, -40 to 85 degC, 24-Pin LGA, RoHS, Tape and Reel", Manufacturer=STMicroelectronics, Package Description="24-Pin Plastic Land Grid Array Package, Body 3.65 x 3.15 mm, Pitch 0.43 mm", Package Reference=LGA-24_3500X3000X1000, PartNumber=LSM9DS1, Sensor Case Style=LGA, Supply Voltage Max=3.6V, Supply Voltage Min=1.9V, Acceleration Range=±2g,±4g,±8g,±16g, Datasheet URL=http://www2.st.com/content/ccc/resource/technical/document/datasheet/1e/3f/2a/d6/25/eb/48/46/DM00103319.pdf/files/DM00103319.pdf/jcr:content/translations/en.DM00103319.pdf, Datasheet Version="Rev. 3, 03/2015", Gyroscope Range=±245°/s,±500°/s,±2000°/s, Manufacturer URL=http://www.st.com/, MEMS Module Function=Tri-AxisGyroscope,Tri-AxisAccelerometer,Tri-AxisMagnetometer, Mounting Technology=SurfaceMount, MSL=MSL3-168hours, No. of Pins=24Pins, Packaging=CutTape, Product Range=-, SVHC=NoSVHC(17-Dec-2015)
U4: library part CMP-003-000000-1, "Dual-mode Bluetooth CC2564 module with integrated antenna", Package="NON-STANDARD-35 Texas Instruments", Availability=Unavailable, Component Type=Standard, Design Item ID=CC2564MODACMOG, DigiKey-Purchase-URL=https://snapeda.com/shop?store=DigiKey&id=476083, MF="Texas Instruments", Mouser-Purchase-URL=https://snapeda.com/shop?store=Mouser&id=476083, MP=CC2564MODACMOG, Pin Count=30, Price=None, SnapEDA_Link=https://www.snapeda.com/parts/CC2564MODACMOG/Texas%20Instruments/view-part/476083/?ref=snap, Source=CC2564MODACMOG.SchLib, Texas_Instruments-Purchase-URL=https://snapeda.com/shop?store=Texas+Instruments&id=476083
U6: library part CMP-09085-000003-1, "IC ECG FRONT END 20LFCSP", Case/Package="LFCSP EP", Input Bias Current=50pA, Input Offset Voltage (Vos)=3mV, Max Operating Temperature=85°C, Max Supply Voltage=3.5V, Min Operating Temperature=-40°C, Min Supply Voltage=2V, Nominal Supply Current=170uA, Package Quantity=1500, Power Supply Rejection Ratio (PSRR)=90dB, Common Mode Rejection Ratio=80dB, Contact Plating=Tin, Lead Free="Contains Lead", Mount="Surface Mount", Number of Pins=20, Operating Supply Current=170uA, Packaging="Tape and Reel", REACH SVHC="No SVHC"

## Free pads (board coordinates)
  round 1.524 hole 0.762: 1(1.397,3.175) 1(1.524,45.72) 1(48.26,45.72) 1(48.514,3.048)

## Via types
v1: diameter 1.27, hole 0.711, Top Layer to Bottom Layer, 10 vias
v2: diameter 0.711, hole 0.711, Top Layer to Bottom Layer, 1 vias

## Nets (pads, with @x,y where several pads share a name; then routed paths per layer and width w, separated by ;. In a path a pad name is that pad's centre, name@x,y a point inside that pad or via, vN(x,y) a via of type N, cw(c..) or ccw(c..) an arc to the next point about the centre after c; other vN are vias at no path point)
1V8: C6.1 JP2.3 U4.18 | length 41.6
  Top Layer w0.254: U4.18 9.157,9.672 9.157,9.651 10.543,8.265 C6.1 v1(11.557,6.604)
  Bottom Layer w0.254: v1(11.557,6.604) 13.052,6.604 13.419,6.237 15.508,6.237 16.002,6.731 16.002,35.941 JP2.3
3V3: C3.1 C5.1 C9.1 JP2.2 R1.1 R2.1 R4.1 R6.2 U3.1 U3.3 U3.22 U3.23 U4.12 U6.15 U6.17 | length 37.3
  Top Layer w0.254: v1(1.651,8.89) 1.27,9.271 C5.1 3.021,10.805 3.051,10.775 U4.12 ; U6.15 26.019,31.533 26.026,31.526 26.258,31.526 26.668,31.115 29.188,31.115 29.673,31.6 29.673,32.517 30.353,33.196 v1(30.353,33.274) 28.585,33.274 C9.1 27.803,33.264 27.686,33.147 27.678,33.155 U6.17 ; R6.2 39.255,26.416 v1(41.402,26.416)
  Bottom Layer w0.254: U3.22 23.597,7.722 23.749,7.874 23.878,7.874 ; U3.3 24.488,6.184 24.027,6.645 U3.23 24.027,7.725 23.878,7.874 ; U3.1 24.887,7.488 25.654,8.255 25.654,9.652 25.527,9.779 24.017,9.779 ; R2.1@28.956,8.113 28.956,9.652 ; R1.1 30.619,7.989 28.956,9.652 ; 23.878,7.874 23.878,8.13 24.017,8.269 24.017,9.779 ; 24.017,9.779 24.017,10.146 23.866,10.297 C3.1 23.993,11.049 v1(27.051,11.049) 28.448,9.652 28.956,9.652
GND: C1.2 C2.1 C3.2 C5.2 C6.2 C7.1 C8.1 C9.2 C13.1 JP2.4 JP2.16 R5.1 R7.2 R17.1 U3.14 U3.15 U3.16 U3.17 U3.18 U3.19 U3.20 U4.5 U4.7 U4.9 U4.13 U4.15 U4.17 U4.25 U4.26 U4.27 U4.28 U4.29 U4.30 U4.31 U4.32 U4.33 U4.34 U4.35 U6.8 U6.16 U6.21 | length 46.7
  Top Layer w0.254: C5.2 2.695,13.48 3.046,13.48 ; U4.33 10.114,9.515 C6.2 ; C8.1 22.362,25.96 21.53,25.96 20.689,25.119 R7.2 20.689,24.919 20.062,24.292 18.695,24.292 18.562,24.425 18.562,25.253 17.548,26.267 17.548,31.751 19.306,33.509 19.4,33.509 20.193,34.302 C13.1 21.331,34.411 22.088,33.655 U6.8 U6.21 ; R17.1 23.742,31.007 23.742,31.305 23.672,31.375 23.672,32.308 U6.21 ; C9.2 28.565,32.004 27.94,32.004 27.289,32.655 U6.16 26.019,32.655 U6.21 ; C7.1@29.845,35.306 C7.1 29.962,35.433 R5.1 v1(31.623,37.084)
  Bottom Layer w0.254: 21.336,5.754 U3.15 ; 21.336,6.184 U3.16 ; 21.346,5.324 U3.14 ; 21.346,6.614 U3.17 ; U3.18 21.082,8.014 21.082,9.642 C3.2 ; C1.2 22.352,8.571 22.352,7.264 U3.19
NetC1_1: C1.1 U3.21 | length 1.9
  Bottom Layer w0.254: U3.21 23.167,8.202 23.114,8.255 23.306,8.447 C1.1
NetC2_2: C2.2 U3.24 | length 2
  Bottom Layer w0.254: U3.24 24.457,7.693 24.928,8.164 C2.2
NetC7_2: C7.2 R4.2 R5.2 U6.18 | length 4.5
  Top Layer w0.254: U6.18 27.432,33.655 ; 27.432,33.663 27.44,33.663 28.585,34.808 C7.2 28.712,35.433 R5.2
NetC8_2: C8.2 R8.1 U6.7 | length 18.4
  Top Layer w0.254: v2(21.844,35.052) 22.595,34.301 22.751,34.301 22.897,34.155 U6.7 ; v1(23.876,24.257) 23.876,26.12 C8.2 24.118,26.289 25.534,24.873 25.885,24.873 26.289,24.469 R8.1
  Bottom Layer w0.254: v2(21.844,35.052) 23.876,33.02 v1(23.876,24.257)
NetC10_1: C10.1 R8.2 R14.1 | length 7.9
  Top Layer w0.254: C10.1 20.32,30.619 21.983,28.956 R14.1 23.326,28.956 25.707,26.575 25.885,26.575 26.289,26.171 R8.2
NetC10_2: C10.2 JP2.5 R9.1 U6.10 | length 7.9
  Top Layer w0.254: R9.1 18.453,28.321 18.453,30.206 20.32,32.072 C10.2 22.338,32.096 22.897,32.655 U6.10
NetC11_1: C11.1 U6.4 | length 2.2
  Top Layer w0.254: C11.1 23.867,37.434 24.519,36.782 U6.4
NetC11_2: C11.2 R16.2 U6.5 | length 2.5
  Top Layer w0.254: C11.2 22.891,37.189 22.891,36.904 24.019,35.777 U6.5
NetC12_1: C12.1 R19.1 U6.20 | length 6.4
  Top Layer w0.254: U6.20 26.91,37.578 27.432,38.1 27.432,38.597 C12.1 ; R19.1 27.188,29.16 27.813,29.785 v1(27.813,29.972)
NetC12_2: C12.2 U6.1 | length 3.3
  Top Layer w0.254: U6.1 26.019,38.465 C12.2
NetC13_2: C13.2 R20.1 U6.6 | length 29.6
  Top Layer w0.254: U6.6 22.994,34.655 22.987,34.662 22.987,35.411 22.457,35.941 20.441,35.941 C13.2 19.31,35.693 16.764,33.147 16.764,25.722 19.091,23.395 26.692,23.395 27.571,24.273 27.571,24.481 28.5,25.41 R20.1
NetJP1_1: JP1.1 R12.1 R13.1 | length 19.8
  Top Layer w0.254: R12.1 R13.1 45.145,7.541 47.611,5.075 JP1.1
NetJP1_2: JP1.2 R10.1 R11.1 | length 17.2
  Top Layer w0.254: R10.1 R10.1@39.251,21.727 ; JP1.2 40.132,7.546 40.132,20.771 39.474,21.429 39.474,21.504 R10.1@39.251,21.727 ; R11.1 R10.1@39.251,21.727
NetJP1_3: JP1.3 R15.1 | length 5
  Top Layer w0.254: R15.1 47.611,18.82 JP1.3
NetJP2_7: JP2.7 JP4.1 U4.3 | length 42
  Top Layer w0.254: U4.3 6.604,16.525 6.604,32.546 5.622,33.528 5.3,33.528 4.449,34.379 4.449,37.757 4.803,38.111 4.803,39.22 JP4.1 8.341,36.998 9.335,36.998 11.557,34.776 11.557,30.226 JP2.7
NetJP2_8: JP2.8 JP4.2 U4.2 | length 15.9
  Top Layer w0.254: JP4.2 10.198,32.601 10.198,31.712 10.795,31.115 10.795,29.571 14.191,26.175 14.191,25.052 JP2.8
NetJP2_9: JP2.9 JP4.3 U4.1 | length 15.9
  Top Layer w0.254: JP4.3 9.844,30.415 9.844,26.859 JP2.9
NetJP2_10: JP2.10 JP4.4 U4.4 | length 17.3
  Top Layer w0.254: JP4.4 4.449,31.246 4.449,17.78 U4.4
NetJP2_13: JP2.13 U6.12
NetJP2_15: JP2.15 U4.8
NetJP3_6: JP3.6
NetJP3_9: JP3.9 U6.11
NetJP3_10: JP3.10 U6.13
NetJP3_11: JP3.11 R3.1 | length 24.4
  Top Layer w0.254: R3.1 12.965,13.25 13.24,13.525 14.05,13.525 15.74,13.525 ; 15.741,13.525 ccw(c15.74,13.697) 15.777,13.529 ccw(c15.396,15.21) 16.256,13.716 30.607,13.716 JP3.11
NetJP3_15: JP3.15 JP5.1 R2.2 U3.2 | length 17.4
  Top Layer w0.254: JP3.15 34.29,8.128 36.068,9.906 36.068,11.303 JP5.1
  Bottom Layer w0.254: U3.2 25.541,6.614 25.666,6.489 R2.2 29.706,7.239 31.496,7.239 ; 31.55,7.239 JP3.15
NetJP3_16: JP3.16 JP5.2 R1.2 U3.4 | length 20.1
  Top Layer w0.254: JP3.16 36.576,6.985 36.576,8.001 38.1,9.525 JP5.2
  Bottom Layer w0.254: U3.4 24.926,5.715 25.273,5.715 26.162,4.826 26.162,4.699 32.639,4.699 ; R1.2 30.861,6.477 32.639,4.699 ; JP3.16 32.639,4.699
NetJP4_5: JP4.5 U4.24
NetR3_2: R3.2 U4.16 | length 14.7
  Top Layer w0.254: U4.16 9.277,7.752 10.048,7.752 10.541,7.259 10.541,6.096 11.176,5.461 12.297,5.461 12.446,5.61 12.446,9.897 11.557,10.786 R3.2
NetR6_1: R6.1 R10.2 R13.2 | length 14.2
  Top Layer w0.254: v1(37.338,22.606) 37.613,22.606 37.984,22.977 R10.2 39.116,23.037 R6.1 ; R13.2 45.212,23.044 v1(45.212,24.638)
  Bottom Layer w0.254: v1(37.338,22.606) 43.18,22.606 v1(45.212,24.638)
NetR7_1: R7.1 R9.2 U6.9 | length 15.4
  Top Layer w0.254: R7.1 19.189,26.894 19.604,27.309 ; R9.2 20.362,28.067 19.604,27.309 ; U6.9 19.453,33.155 19.304,33.006 19.304,31.557 17.902,30.155 17.902,27.442 18.035,27.309 19.604,27.309
NetR11_2: R11.2 U6.2 | length 3.7
  Top Layer w0.254: 24.511,38.862 25.519,37.854 U6.2
NetR12_2: R12.2 U6.3 | length 3.5
  Top Layer w0.254: 23.876,38.481 24.009,38.481 24.692,37.799 24.692,37.284 25.019,36.957 U6.3
NetR14_2: R14.2 R18.2 U6.19 | length 18.1
  Top Layer w0.254: U6.19 27.141,34.155 27.294,34.308 27.299,34.308 27.783,34.793 27.783,37.252 28.478,37.946 31.98,37.946 32.485,37.441 32.485,34.101 30.851,32.467 R18.2
NetR15_2: R15.2 R16.1 | length 1.4
  Top Layer w0.254: R16.1 R15.2 R15.2@47.304,20.497
NetR17_2: R17.2 U6.14 | length 1.1
  Top Layer w0.254: R17.2@25.388,30.734 25.519,30.865 U6.14
NetR18_1: R18.1 R19.2 R20.2 | length 3.1
  Top Layer w0.254: R20.2 28.438,26.797 R19.2 28.438,28.269 28.661,28.492 29.339,28.492 29.601,28.754 R18.1
pads on no net: JP1.4 JP1.5 JP1.MH1 JP1.MH2 JP2.1 JP2.6 JP2.11 JP2.12 JP2.14 JP3.1 JP3.2 JP3.3 JP3.4 JP3.5 JP3.7 JP3.8 JP3.12 JP3.13 JP3.14 U3.5 U3.6 U3.7 U3.8 U3.9 U3.10 U3.11 U3.12 U3.13 U4.6 U4.10 U4.11 U4.14 U4.19 U4.20 U4.21 U4.22 U4.23

## Polygon pours and split planes (outlines as drawn)
GND on GROUND (split plane): 49.274,2.288 0.51,2.288 0.51,46.734 49.274,46.734
3V3 on POWER (split plane): 49.274,2.288 0.51,2.288 0.51,46.734 49.274,46.734